# Altium PCB DVI_D_out.PcbDoc
Units mil, origin at the board's own origin, x right, y up, seen from the top; angles counter-clockwise.
Board outline 2370 x 2127 mil, 4 copper layers (Top Layer, Signal Layer 1, Signal Layer 2, Bottom Layer), stack 39.2 mil thick; 26 components, 47 nets, 207 pads, 228 vias.
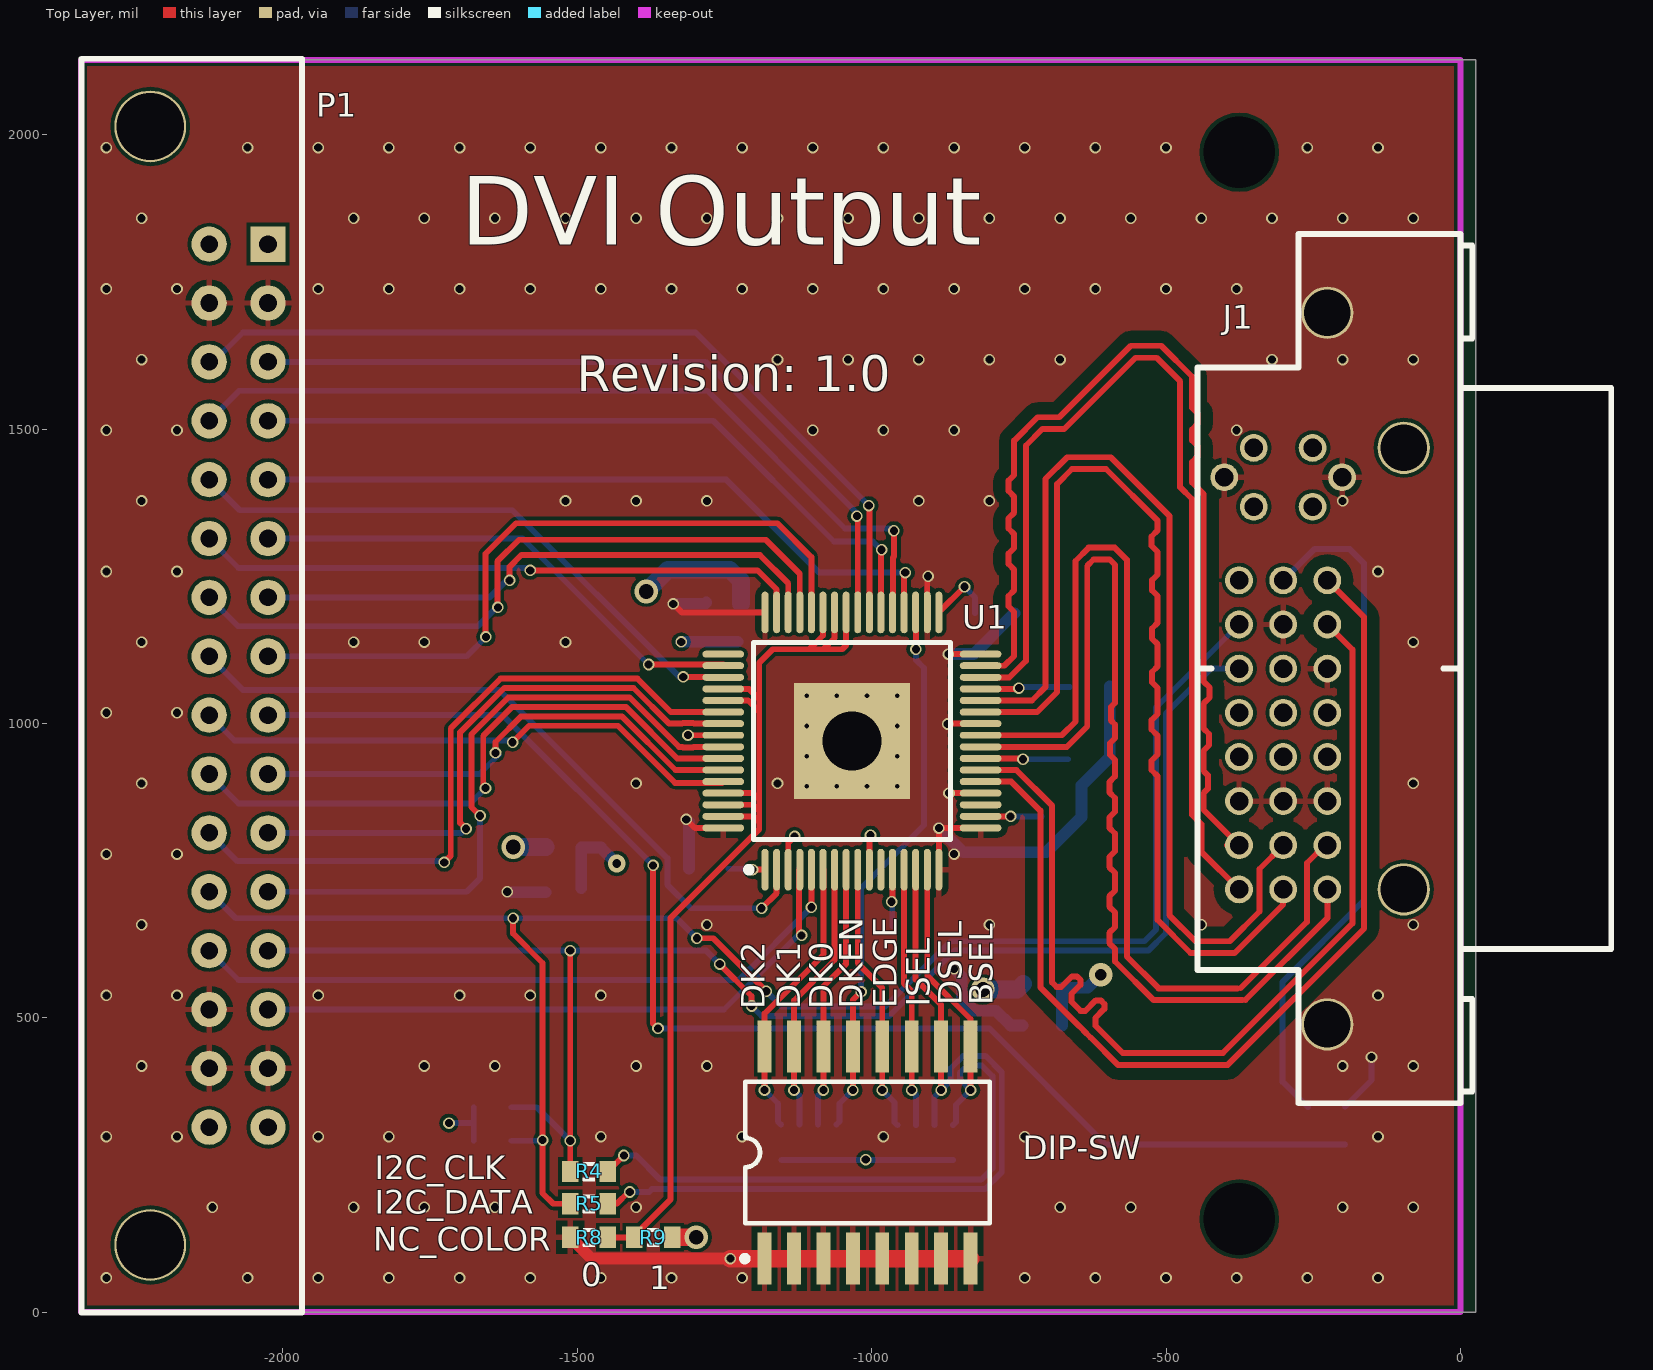
[diagram p0: Top Layer view]
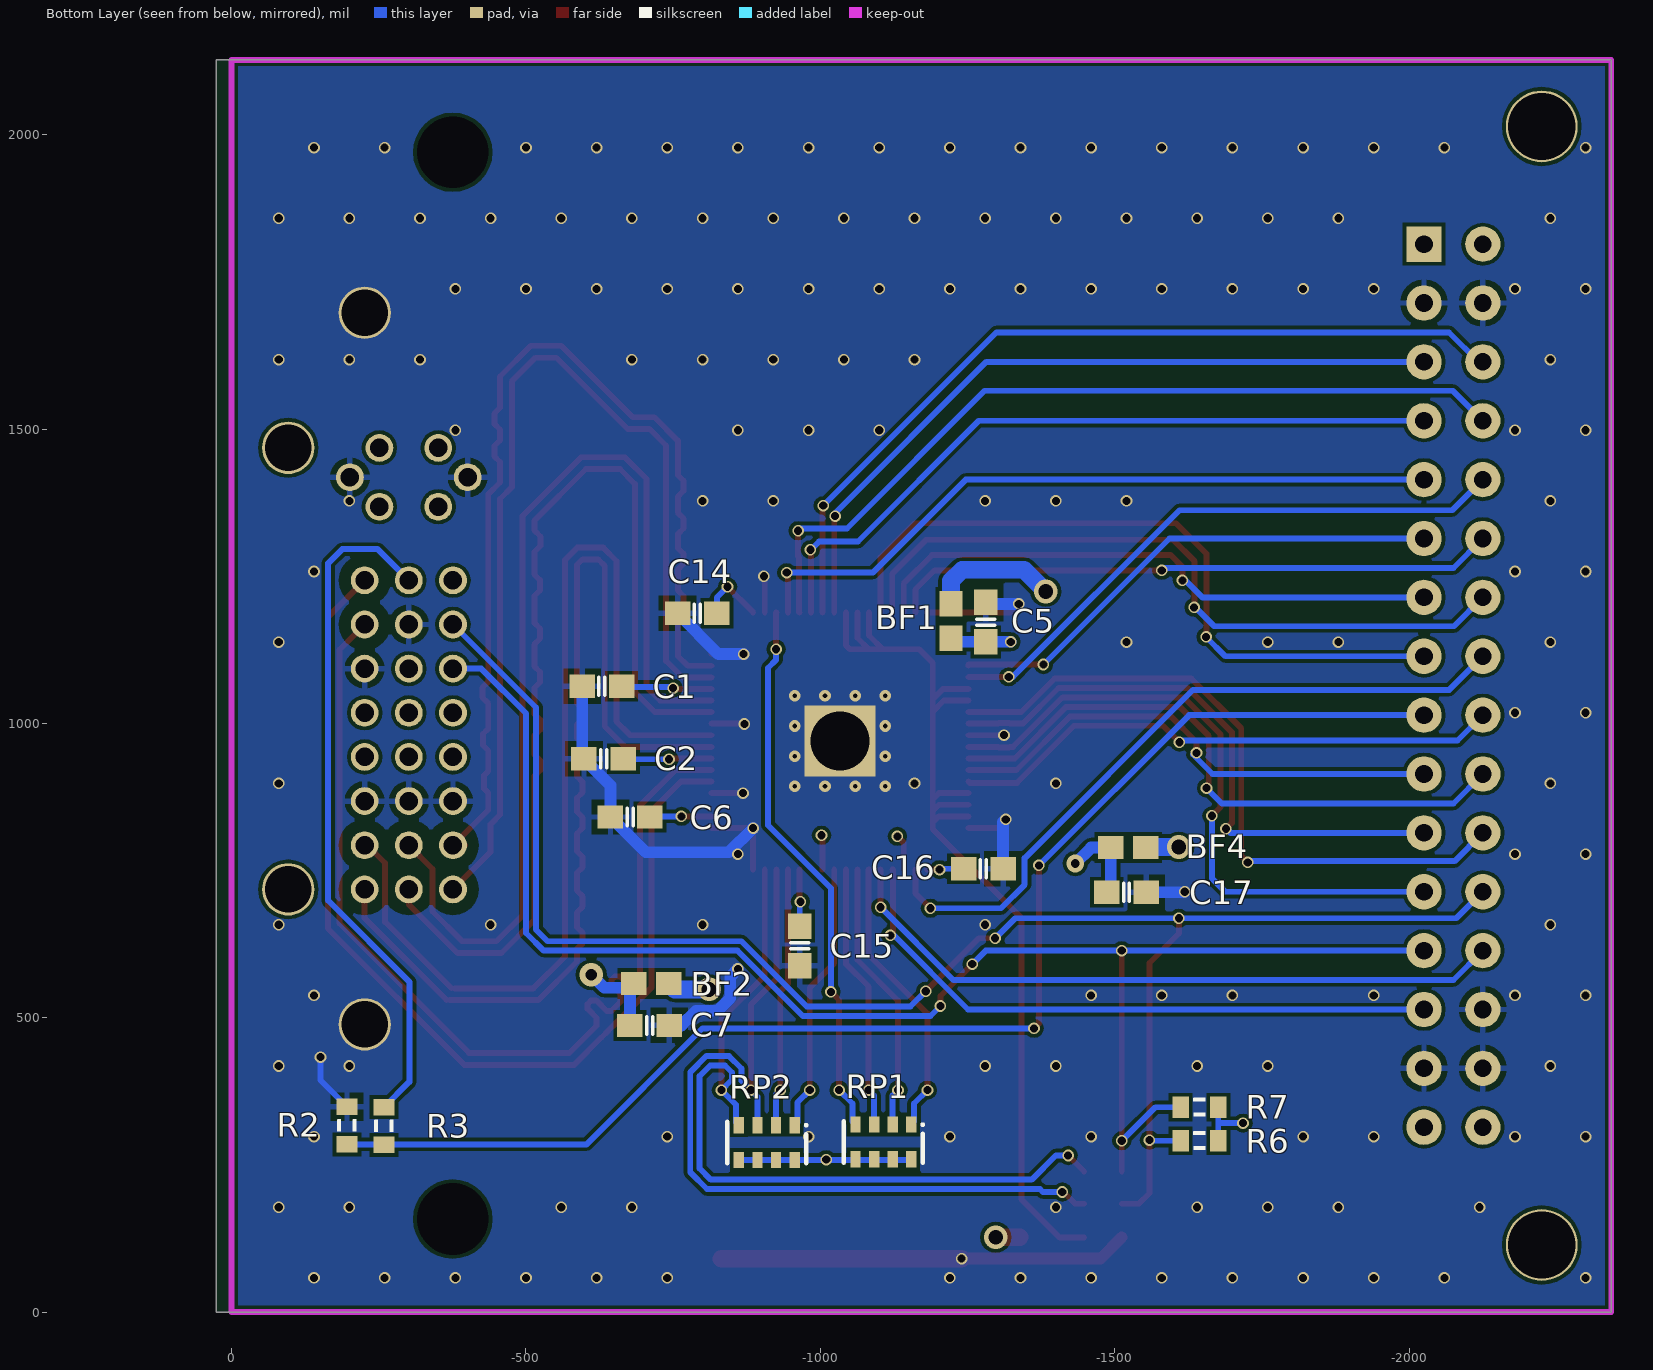
[diagram p1: Bottom Layer view, seen from below]
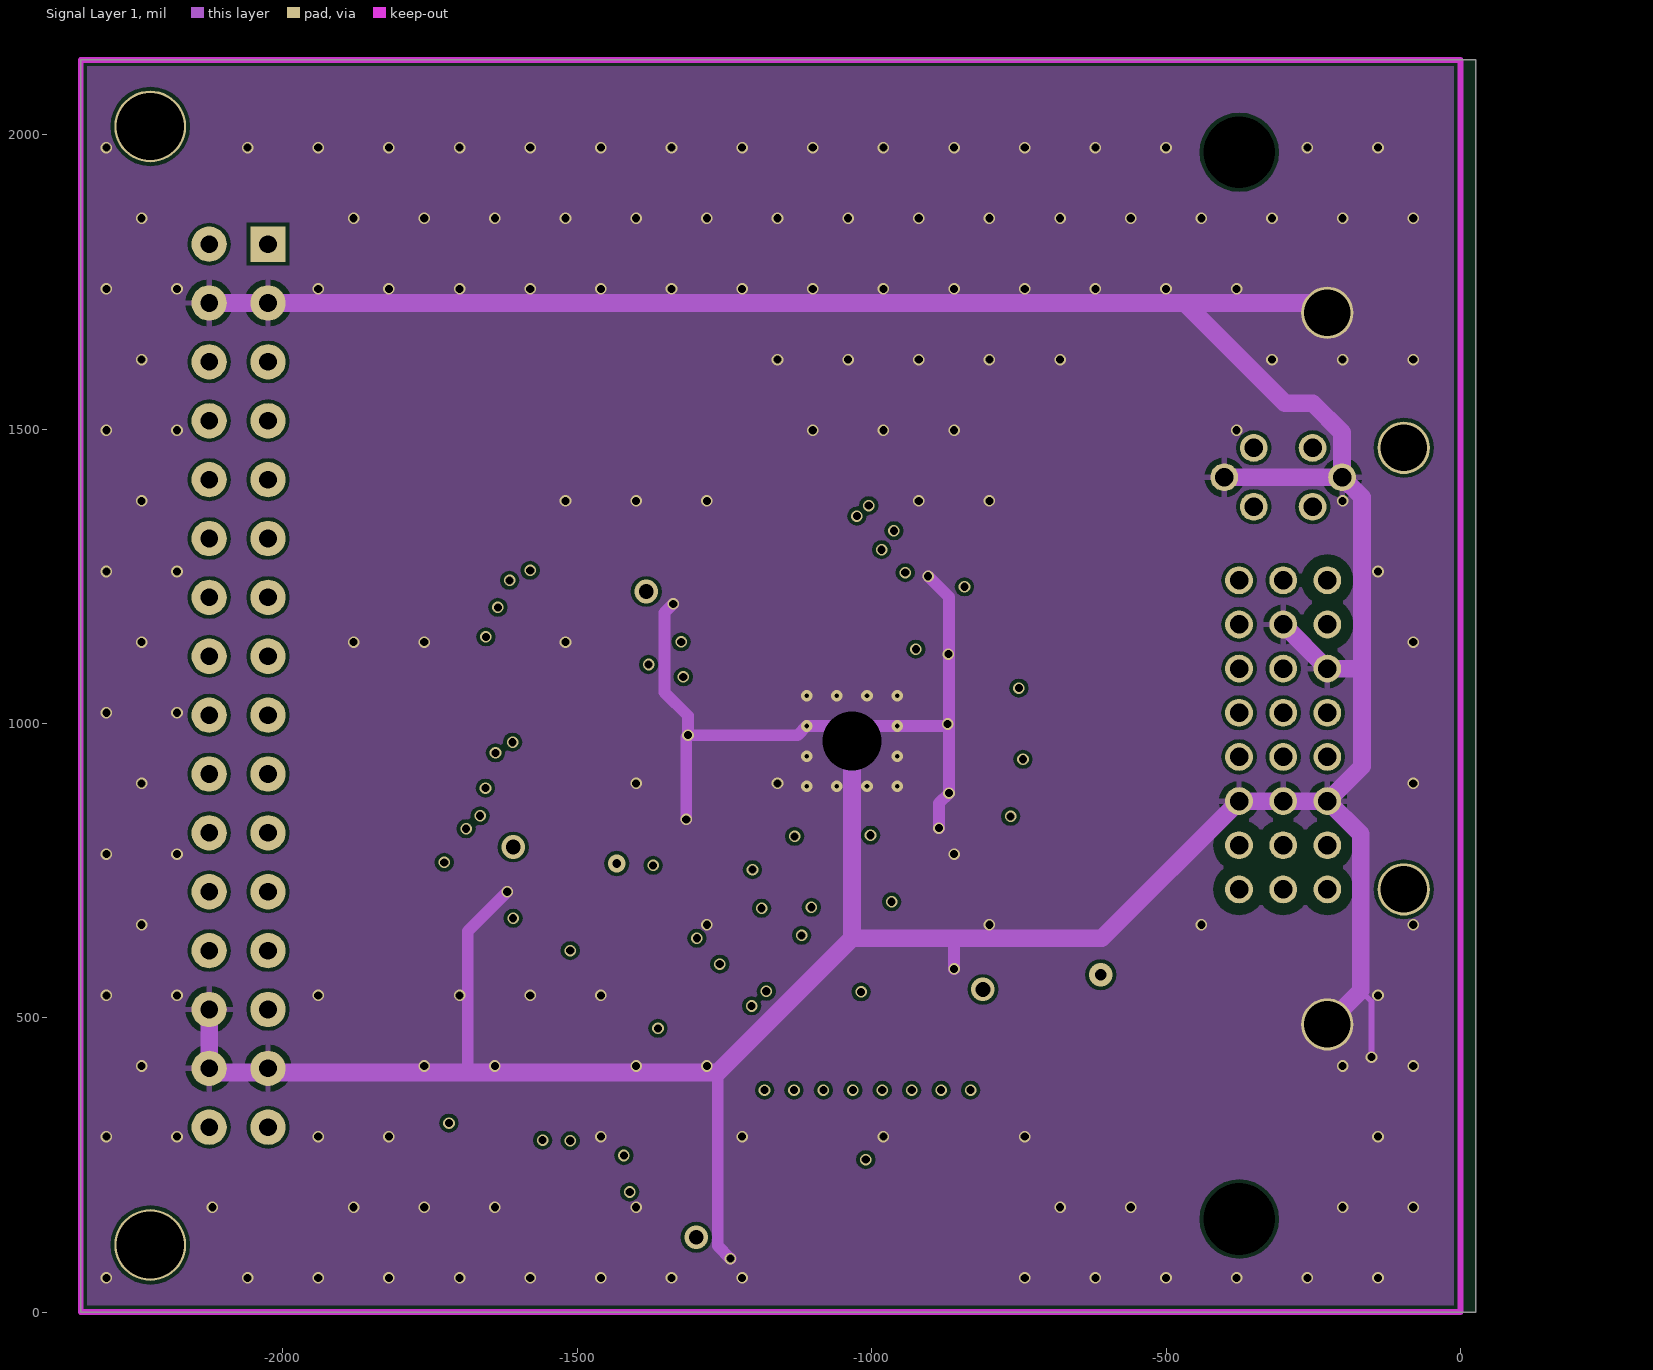
[diagram p2: Signal Layer 1]
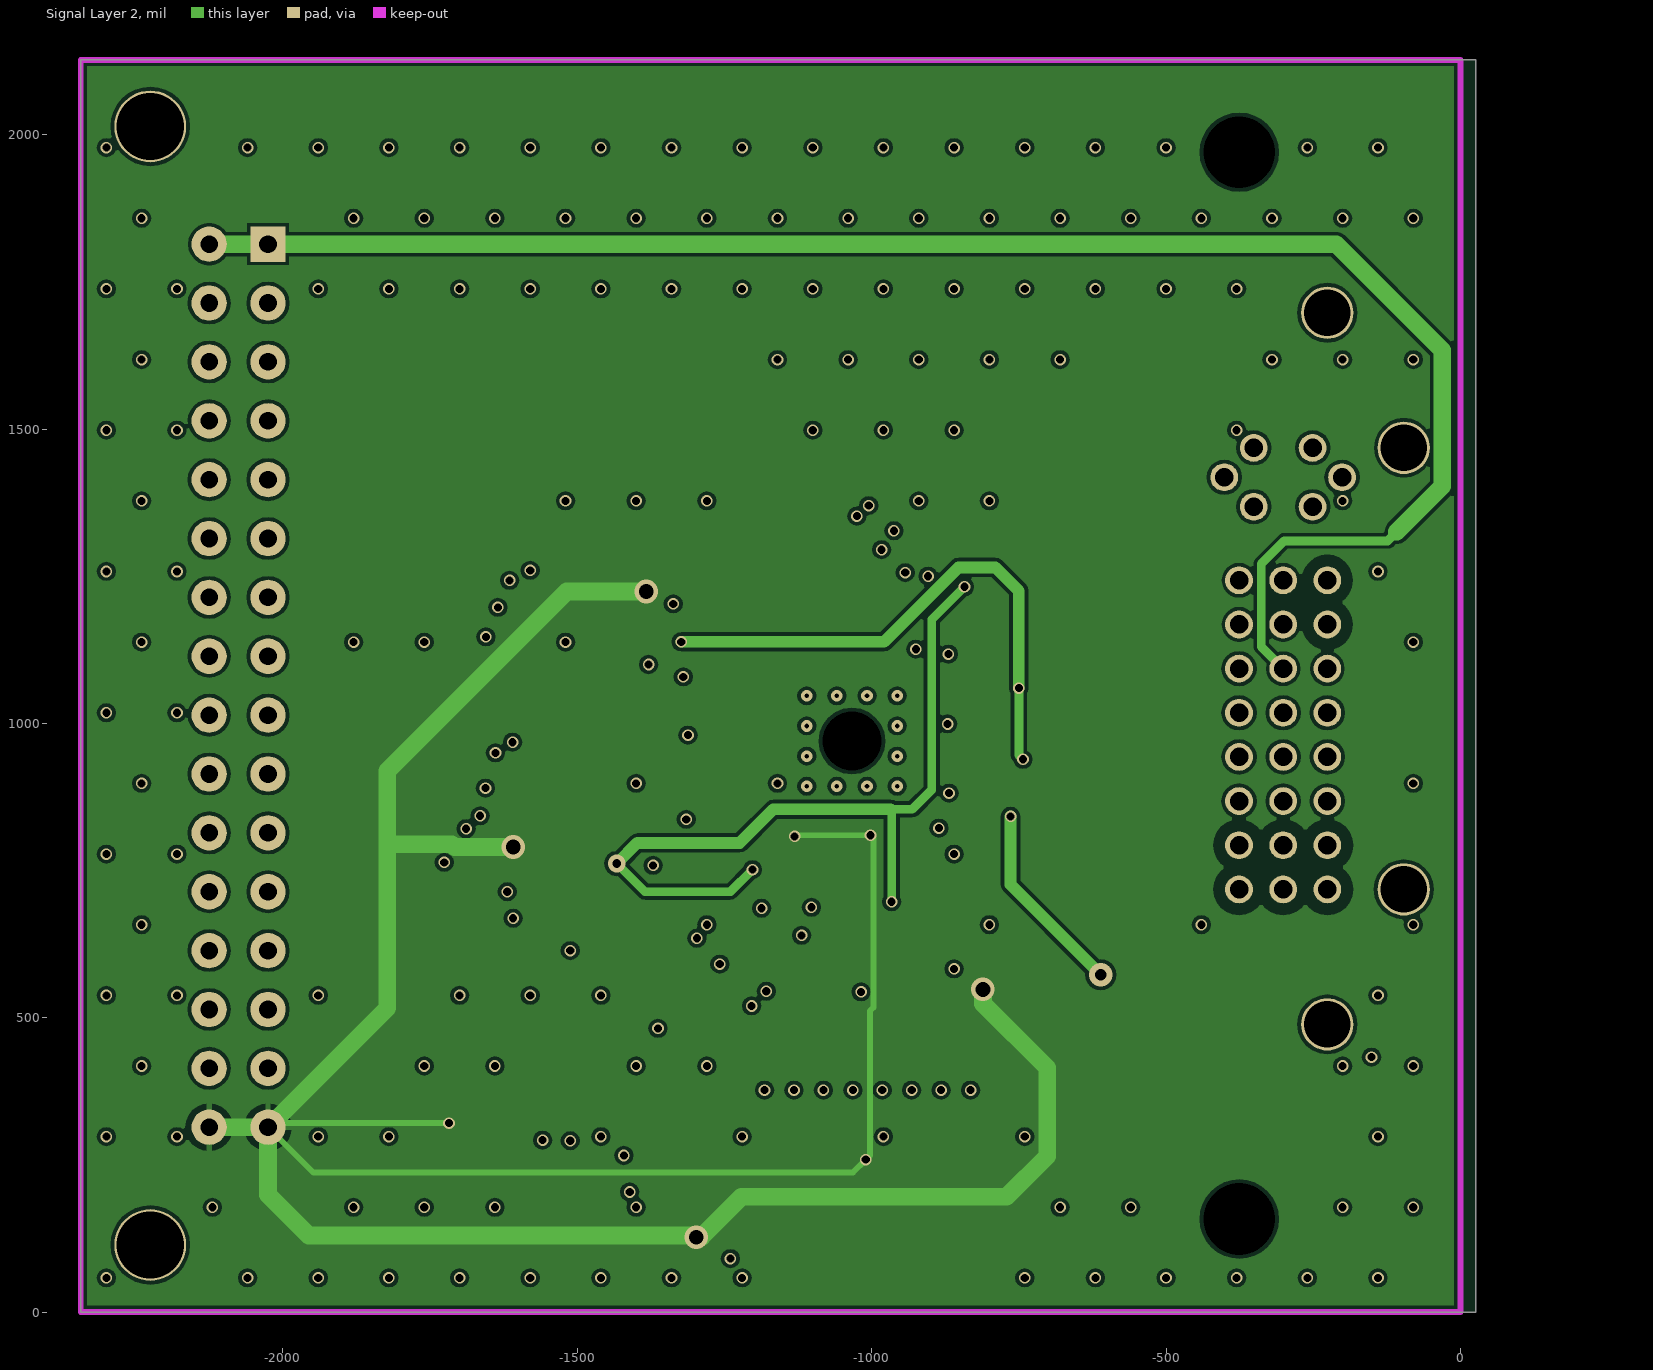
[diagram p3: Signal Layer 2]
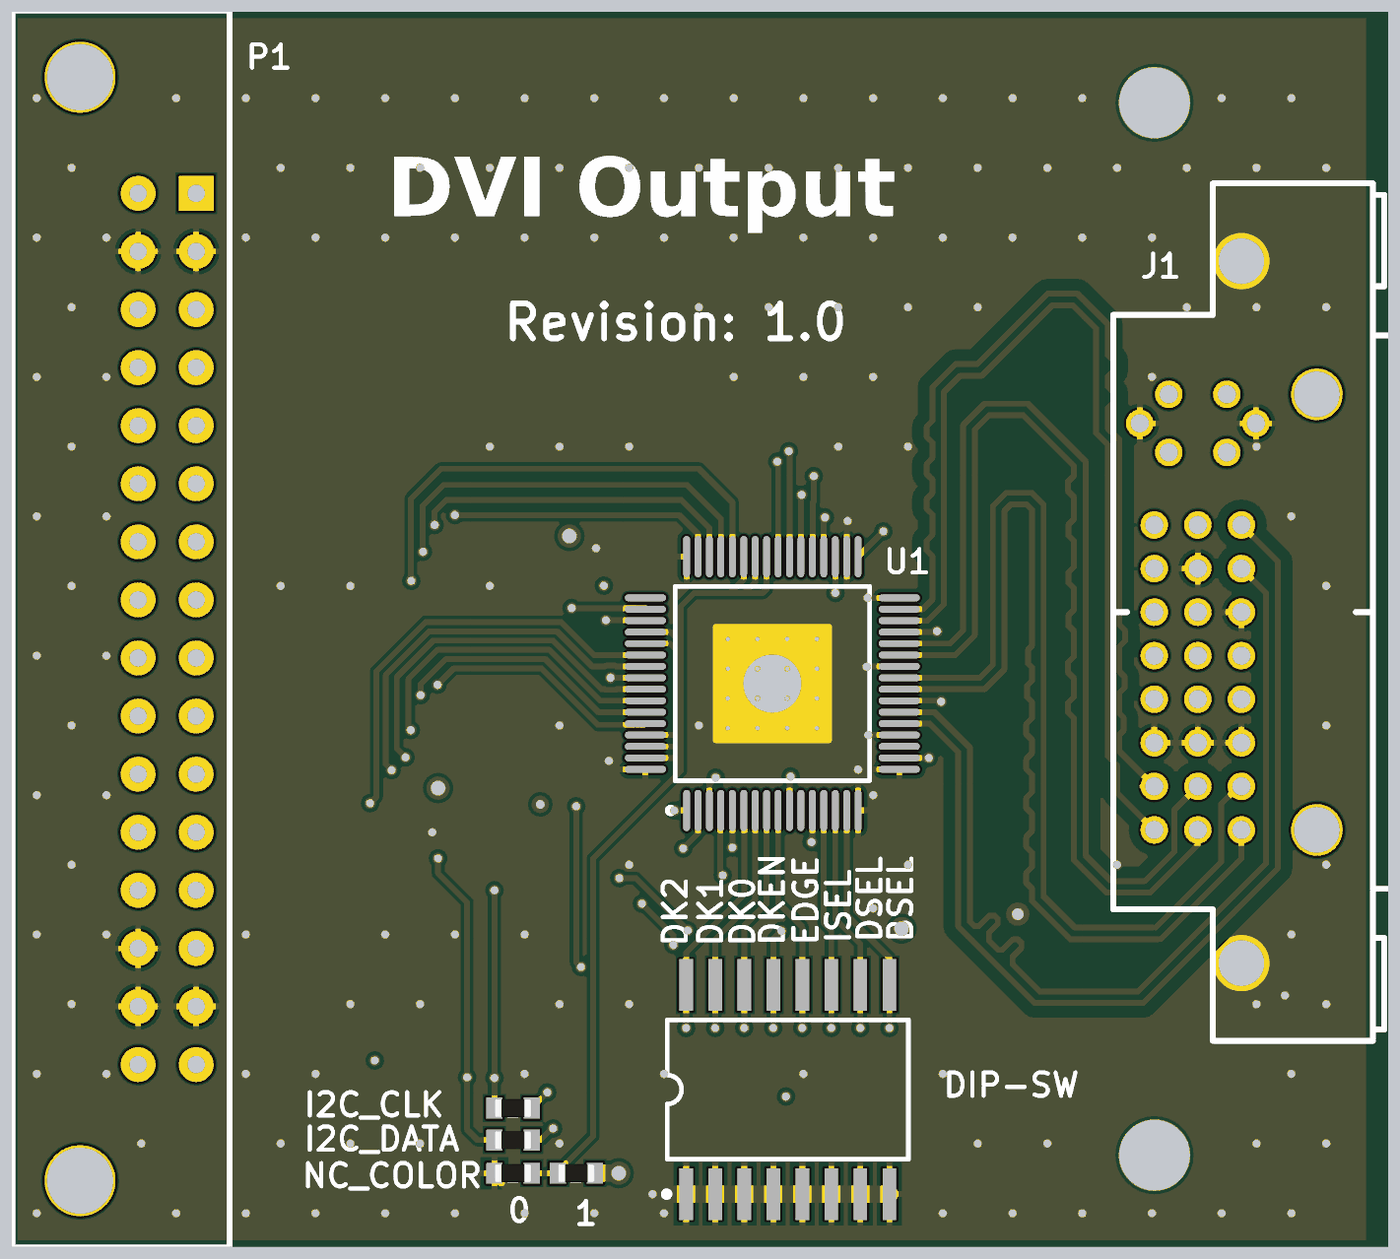
[diagram p4: 3D render of the assembled board from above, using the file's embedded part models]
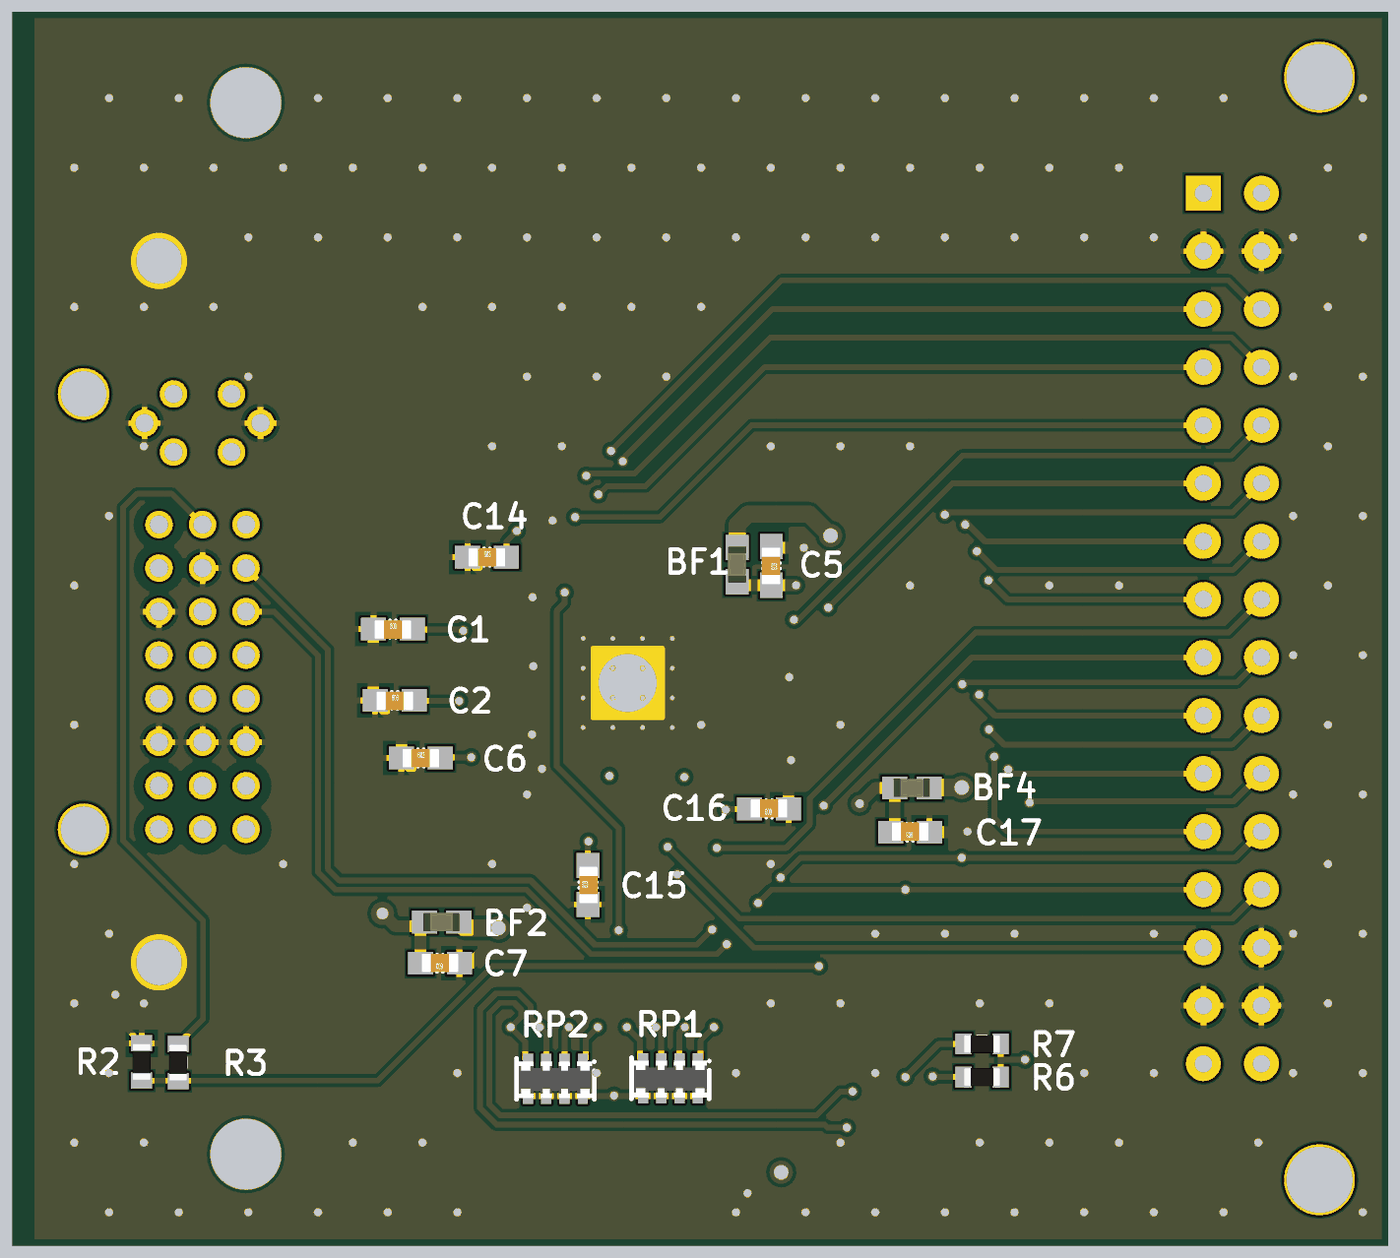
[diagram p5: 3D render of the assembled board from below, using the file's embedded part models]

## Layer stack, top to bottom
Top Solder: solder mask 0.4, Solder Resist, Dk 3.5
Top Layer: signal copper 1.4
Dielectric 1: core 15, FR-4, Dk 4.34
Signal Layer 1: signal copper 0.7
Dielectric 3: prepreg 5, Dk 4.2
Signal Layer 2: signal copper 0.7
Dielectric 2: core 15, FR-4, Dk 4.34
Bottom Layer: signal copper 1.4
Bottom Solder: solder mask 0.4, Solder Resist, Dk 3.5

## Board outline
-2343.5,0 -2343.5,2127 26.5,2127 26.5,0

## Design rules (kind name [scope] priority, off if disabled: settings)
Clearance "Poly and Diff" [InPoly vs InAnyDifferentialPair] p1: gap=20
Clearance "Stitching GND" [IsStitchingVia and InNet('GND') vs (IsVia and (Not IsStitchingVia)) Or IsPad] p2: gap=5
Clearance [All] p3: gap=6
DiffPairsRouting [All] p1: maxlimit=10 minlimit=10 mostfreqgap=10 toplayer_minwidth=6 toplayer_maxwidth=15 toplayer_prefwidth=15 midlayer1_minwidth=6 midlayer1_maxwidth=15 midlayer1_prefwidth=15 midlayer2_minwidth=6 midlayer2_maxwidth=15 midlayer2_prefwidth=15 bottomlayer_minwidth=6 bottomlayer_maxwidth=15 bottomlayer_prefwidth=15 maxuncoupledlength=500
MinimumSolderMaskSliver [All] p1: minsoldermaskwidth=3
PolygonConnect PolygonConnect_2 [All vs IsVia  Or (IsPad And HoleSize > 50)] p1: connectstyle=Direct reliefconductorwidth=10 reliefentries=4 polygonreliefangle="90 Angle" airgapwidth=10
PolygonConnect [All] p2: connectstyle=Relief reliefconductorwidth=10 reliefentries=4 polygonreliefangle="90 Angle" airgapwidth=10
RoutingVias [All] p1: holewidth=28 width=50 viastyle="Through Hole" minholewidth=11.81 minwidth=19.68 maxholewidth=39.37 maxwidth=50
SilkToSilkClearance [All] p1: silktosilkclearance=6
SilkToSolderMaskClearance [IsPad] p1: minsilkscreentomaskgap=3 clearancetoexposedcopper=TRUE
SolderMaskExpansion [All] p1: expansion=4
Width Width_Diff [InNetClass('Diff')] p1: maxlimit=10 minlimit=10 preferedwidth=10 impedancedriven=TRUE minimp=50.000000 maximp=50.000000 favimp=50.000000
Width [All] p2: maxlimit=40 minlimit=6 preferedwidth=10
26 further rules are at their usual default settings.

## Classes and differential pairs
differential pair D2: +D2_P -D2_N
differential pair D1: +D1_P -D1_N
differential pair D0: +D0_P -D0_N
differential pair CLK: +CLK_P -CLK_N

## Components (designator, comment, footprint, x,y, rotation, side; value= is the part's Value field where it differs from the comment)
BF1 "GZ1608D121TF" L-1608[0603] -1222,1174 r270 bottom
BF2 "GZ1608D121TF" L-1608[0603] -713,558 r0 bottom
BF4 "GZ1608D121TF" L-1608[0603] -1523,789 r0 bottom
C1 "Cap Semi" C-1608[0603] -629,1063 r180 bottom
C2 "Cap Semi" C-1608[0603] -632,940 r180 bottom
C5 "Cap Semi" C-1608[0603] -1281,1172 r270 bottom
C6 "Cap Semi" C-1608[0603] -677,841 r180 bottom
C7 "Cap Semi" C-1608[0603] -710,487 r0 bottom
C14 "Cap Semi" C-1608[0603] -791,1187 r180 bottom
C15 "Cap Semi" C-1608[0603] -965,622 r90 bottom
C16 "Cap Semi" C-1608[0603] -1277,753 r0 bottom
C17 "Cap Semi" C-1608[0603] -1520,713 r0 bottom
DIP-SW "DIP_SW" SO16W -1007,271 r0 top
J1 "DVI-I 24+5" DVI-I -226,1093 r270 top
P1 "CUPIIN 9001-38321C00A" "OUPIIN 9001-38321C00A" -2125.39,1814.01 r0 top
R2 "Res_0603" RES_0603 -196,317 r270 bottom
R3 "Res_0603" RES_0603 -259,316 r270 bottom
R4 "Res_0603" RES_0603 -1480,239 r180 top
R5 "Res_0603" RES_0603 -1480,184 r180 top
R6 "Res_0603" RES_0603 -1644,291 r180 bottom
R7 "Res_0603" RES_0603 -1644,348 r180 bottom
R8 "Res_0603" RES_0603 -1480,127 r180 top
R9 "Res_0603" RES_0603 -1371,127 r0 top
RP1 "10K" R0603x4 -1107,289 r0 bottom
RP2 "10K" R0603x4 -909,288 r0 bottom
U1 "TFP410PAP" PAP64-4650X4650TP_N -1033.5,970 r90 top

## Footprints (in the part's own frame and the unit in brackets; to place one, negate y for a bottom-side part, rotate by r counter-clockwise, add the part's x,y. Pads: shape width x height; smd on the part's side, far side on the other; paste and mask are expansions set on the pad)
C-1608[0603] [mm] "Chip Capacitor; Body 1.6 x 0.8 mm (LxW typ)"
  rect 1.1x1 smd: 1(-0.85,0) 2(0.85,0)
  silkscreen extent -0.13,-0.38 0.13,0.38, body extent -0.8,-0.42 0.8,0.38, height 0.29
DVI-I [mm]
  round 2.254 hole 2: 0(-15.35,0) 0(15.35,0) -1(-9.525,3.3) -1(9.525,3.3)
  round 1.2 hole 0.8: 1(9.525,-3.81) 2(7.62,-3.81) 3(5.715,-3.81) 4(3.81,-3.81) 5(1.905,-3.81) 6(0,-3.81) 7(-1.905,-3.81) 8(-3.81,-3.81) 9(9.525,-1.905) 10(7.62,-1.905) 11(5.715,-1.905) 12(3.81,-1.905) 13(1.905,-1.905) 14(0,-1.905) 15(-1.905,-1.905) 16(-3.81,-1.905) 17(9.525,0) 18(7.62,0) 19(5.715,0) 20(3.81,0) 21(1.905,0) 22(0,0) 23(-1.905,0) 24(-3.81,0) C1(-6.985,-3.175) C2(-9.525,-3.175) C3(-6.985,-0.635) C4(-9.525,-0.635) C5(-8.255,0.635) C5(-8.255,-4.445)
  silkscreen extent -18.75,-5.6 18.75,12.25
L-1608[0603] [mm] "Chip Inductor, Body 1.6x0.8mm, IPC Medium Density"
  rect 1.1x1 smd: 1(-0.75,0) 2(0.75,0)
  body extent -0.8,-0.41 0.8,0.39, height 0.45
"OUPIIN 9001-38321C00A" [mil]
  round 122.05 hole 114.17: 0(-100,-1700) 0(-100,200)
  rect 60x60 hole 30: 1(100,0)
  round 60 hole 30: 2(0,0) 3(100,-100) 4(0,-100) 5(100,-200) 6(0,-200) 7(100,-300) 8(0,-300) 9(100,-400) 10(0,-400) 11(100,-500) 12(0,-500) 13(100,-600) 14(0,-600) 15(100,-700) 16(0,-700) 17(100,-800) 18(0,-800) 19(100,-900) 20(0,-900) 21(100,-1000) 22(0,-1000) 23(100,-1100) 24(0,-1100) 25(100,-1200) 26(0,-1200) 27(100,-1300) 28(0,-1300) 29(100,-1400) 30(0,-1400) 31(100,-1500) 32(0,-1500)
  silkscreen extent -217,-1815 157,315
PAP64-4650X4650TP_N [mm] "Thin QFP, 64-Leads, Body 10x10mm, Pitch 0.5mm, Thermal Pad 5x5mm, IPC Medium Density"
  oval 1.8x0.3 smd: 1(-5.55,3.75) 2(-5.55,3.25) 3(-5.55,2.75) 4(-5.55,2.25) 5(-5.55,1.75) 6(-5.55,1.25) 7(-5.55,0.75) 8(-5.55,0.25) 9(-5.55,-0.25) 10(-5.55,-0.75) 11(-5.55,-1.25) 12(-5.55,-1.75) 13(-5.55,-2.25) 14(-5.55,-2.75) 15(-5.55,-3.25) 16(-5.55,-3.75) 33(5.55,-3.75) 34(5.55,-3.25) 35(5.55,-2.75) 36(5.55,-2.25) 37(5.55,-1.75) 38(5.55,-1.25) 39(5.55,-0.75) 40(5.55,-0.25) 41(5.55,0.25) 42(5.55,0.75) 43(5.55,1.25) 44(5.55,1.75) 45(5.55,2.25) 46(5.55,2.75) 47(5.55,3.25) 48(5.55,3.75)
  oval 0.3x1.8 smd: 17(-3.75,-5.55) 18(-3.25,-5.55) 19(-2.75,-5.55) 20(-2.25,-5.55) 21(-1.75,-5.55) 22(-1.25,-5.55) 23(-0.75,-5.55) 24(-0.25,-5.55) 25(0.25,-5.55) 26(0.75,-5.55) 27(1.25,-5.55) 28(1.75,-5.55) 29(2.25,-5.55) 30(2.75,-5.55) 31(3.25,-5.55) 32(3.75,-5.55) 49(3.75,5.55) 50(3.25,5.55) 51(2.75,5.55) 52(2.25,5.55) 53(1.75,5.55) 54(1.25,5.55) 55(0.75,5.55) 56(0.25,5.55) 57(-0.25,5.55) 58(-0.75,5.55) 59(-1.25,5.55) 60(-1.75,5.55) 61(-2.25,5.55) 62(-2.75,5.55) 63(-3.25,5.55) 64(-3.75,5.55)
  rect 5x5 / inner rect 0x0 / far side rect 3.048x3.048 hole 2.54: 65(0,0)
  silkscreen extent -5.67,-4.25 4.25,4.57, body extent -5,-5 5,5, height 1.2
R0603x4 [mm] "Chip Resistor Array, (0603x4); SM; 8 Leads; Body 3.40 x 1.80 mm (LxW max)"
  rect 0.45x0.7 smd: 1(-1.2,-0.75) 2(-0.4,-0.75) 3(0.4,-0.75) 4(1.2,-0.75) 5(1.2,0.75) 6(0.4,0.75) 7(-0.4,0.75) 8(-1.2,0.75)
  silkscreen extent -1.75,-0.9 1.7,0.9, body extent -1.6,-0.76 1.6,0.84, height 0.65
RES_0603 [mil]
  rect 28x36 smd: 1(-32,0) 2(32,0)
  silkscreen extent -10,-16 10,16, body extent -31,-16 32,16, height 20
SO16W [mm] "Small Outline; 16 Leads; Body Width 7.5 mm; Pitch 1.27 mm"
  rect 0.6x2.25 smd: 1(-4.445,-4.575) 2(-3.175,-4.575) 3(-1.905,-4.575) 4(-0.635,-4.575) 5(0.635,-4.575) 6(1.905,-4.575) 7(3.175,-4.575) 8(4.445,-4.575) 9(4.445,4.575) 10(3.175,4.575) 11(1.905,4.575) 12(0.635,4.575) 13(-0.635,4.575) 14(-1.905,4.575) 15(-3.175,4.575) 16(-4.445,4.575)
  silkscreen extent -5.42,-4.7 5.27,3.05

## Part data
BF1 BF2 BF4: library part Inductor
C1 C2 C5 C6 C7 C14 C15 C16 C17: "Capacitor (Semiconductor SIM Model)"
J1: library part DVI-I
P1: library part "Header 16X2", "Header, 16-Pin, Dual row"
R2 R3 R4 R5 R6 R7 R8 R9: "Resistor"
RP1 RP2: library part RPACK4
U1: library part CMP-0325-00079-1, "PanelBus DVI Transmitter 165 MHz with 3 Data Channels, 3.3 V, 0 to +70 degC, 64-pin HTQFP (PAP), Green (RoHS & no Sb/Br)"

## Free pads (board coordinates)
  round 0 hole 122.05: 0(-375.6,157.98) 0(-375.6,1970.02)

## Via types
v1: diameter 19.68, hole 13.78, Top Layer to Bottom Layer, 206 vias
v2: diameter 19.68, hole 7.87, Top Layer to Bottom Layer, 16 vias
v3: diameter 40, hole 25, Top Layer to Bottom Layer, 4 vias
v4: diameter 40, hole 20, Top Layer to Bottom Layer, 1 vias
v5: diameter 30, hole 15, Top Layer to Bottom Layer, 1 vias

## Nets (pads, with @x,y where several pads share a name; then routed paths per layer and width w, separated by ;. In a path a pad name is that pad's centre, name@x,y a point inside that pad or via, vN(x,y) a via of type N, cw(c..) or ccw(c..) an arc to the next point about the centre after c; other vN are vias at no path point)
+3.3V: BF1.1 BF2.1 BF4.1 P1.31 P1.32 R6.2 R7.2 R9.2 RP1.5 RP1.6 RP1.7 RP1.8 RP2.5 RP2.6 RP2.7 RP2.8 U1.3 U1.10 | length 6363.2
  Top Layer w10: U1.3 -1141.77,797.23 v1(-1131,808) ; U1.10 -1003.97,809.03 -1003,810 v1(-1002,810)
  Top Layer w30: R9.2 v3(-1298,127)
  Signal Layer 2 w10: P1.31 -1948.38,237 -1032,237 v1(-1010,259) ; P1.31@-2018.4,321 v1(-1718,321) ; v1(-1131,808) -1129,810 v1(-1002,810) -997.16,805.16 -997.16,517.32 -1002.84,511.63 -1002.84,266.16
  Signal Layer 2 w30: P1.32 P1.31 ; v3(-1609,790) -1708.38,790 -1713.22,794.84 -1815.16,794.84 -1823,787 ; v3(-1383,1224) -1518,1224 -1823,919 -1823,787 ; v3(-1298,127) v3@-1289,127 ; v3@-1298,130 -1956,130 -2025.39,199.39 P1.31 ; v3@-1289,130 -1287,130 -1221,196 -771,196 -702,265 -702,415 -811,524 v3(-811,548) ; P1.31 -2018.4,321 -1823,516.4 -1823,787
  Bottom Layer w10: v1(-1718,321) -1676,321 ; R6.2 -1676,321 ; R7.2 -1676,321 ; RP1.8@-1153.24,258.47 -1091.25,258.47 RP2.8 RP2.7 RP2.6 RP2.5
  Bottom Layer w30: v3(-1609,790) BF4.1@-1553.53,790 ; v3(-1383,1224) -1346,1261 -1241,1261 -1222,1242 BF1.1 ; v3(-811,548) -752.53,548 BF2.1
+5V: J1.14 P1.1 P1.2 | length 2955.7
  Signal Layer 2 w15: J1.14 -338.12,1130.12 -338.12,1270.88 -299,1310 -123.34,1310 -108,1325.34
  Signal Layer 2 w30: P1.2 P1.1 -211.01,1814.01 -30.71,1633.71 -30.71,1402.63 -108,1325.34
_UNUSED: R8.1 R9.1 U1.41 U1.42 U1.43 U1.52 U1.53 U1.61 U1.62 U1.63 | length 1799.4
  Top Layer w10: R8.1 -1406,127 -1342,191 -1342,669 -1191,820 -1191,832 ; U1.63 -1201.05,842.05 -1191,832 ; U1.62 -1201.73,861.73 -1191,851 ; U1.61 -1201.42,881.42 -1191,871 ; U1.53 -1209.9,1038.9 -1191,1020 ; U1.52 -1208.58,1058.58 -1191,1041 ; -1082.71,1126.71 -1082,1126 ; U1.43 -1082.71,1149.29 -1106,1126 ; U1.42 -1063.03,1144.97 -1082,1126 ; U1.41 -1043.34,1132.66 -1050,1126 -1082,1126 ; -1191,832 -1191,851 ; -1191,851 -1191,871 ; -1191,871 -1191,1020 ; -1191,1020 -1191,1041 ; -1191,1041 -1191,1103 -1168,1126 -1106,1126 ; -1106,1126 -1082,1126
B3: P1.18 U1.60 | length 945.1
  Top Layer w10: v1(-1610,968) -1582,996 -1431,996 -1334,899 -1254.11,899 U1.60
  Bottom Layer w10: P1.18 -2082.38,971 -1613,971 v1(-1610,968)
B4: P1.19 U1.59 | length 874.6
  Top Layer w10: v1(-1639,950) -1639,968.48 -1595.48,1012 -1424.37,1012 -1333.16,920.79 U1.59
  Bottom Layer w10: P1.19 -1665.99,914.01 -1633,947 -1636,950 v1(-1639,950)
B5: P1.20 U1.58 | length 1055.7
  Top Layer w10: v1(-1656,890) -1659.84,893.84 -1659.84,978.78 -1610.63,1028 -1417.75,1028 -1330.22,940.47 U1.58
  Bottom Layer w10: P1.20 -2075.38,864 -1682,864 v1(-1656,890)
B6: P1.21 U1.55 | length 1012
  Top Layer w10: v1(-1689,821) -1699,831 -1699,984.88 -1623.88,1060 -1404.49,1060 -1344.02,999.53 -1321.95,999.53 -1320.63,1000.84 -1303.37,1000.84 -1302.05,999.53 U1.55
  Bottom Layer w10: P1.21 -1696.99,814.01 -1689.5,821.5 v1(-1689,821)
B7: P1.22 U1.54 | length 1172.9
  Top Layer w10: v1(-1726,764) -1715,775 -1715,991.51 -1630.51,1076 -1397.86,1076 -1341.08,1019.21 U1.54
  Bottom Layer w10: P1.22 -2077.38,766 v1@-1726,766
BSEL: DIP-SW.9 R4.1 RP2.4 U1.15 | length 1427.7
  Top Layer w10: R4.1 v1(-1421,266) ; U1.15 -905.55,571.55 -832,498 DIP-SW.9 v1(-832,377)
  Bottom Layer w10: v1(-1421,266) -1400,266 -1359,225 -814,225 -795,244 -795,401 -813,419 -838,419 -850,407 -850,395 v1(-832,377) -856.76,352.24 -856.76,322.53 RP2.4
CLK_N: J1.24 U1.21 | length 1739.9
  Top Layer w10: U1.21 -762.89,901.1 -713.5,851.72 -713.5,551.72 -665.1,503.32 -665.1,503.12 -653.38,491.4 -653.18,491.4 -640,478.22 -640,478.02 -628.28,466.3 -628.08,466.3 -581.78,420 -395.21,420 -163.5,651.72 -163.5,1180.5 J1.24
CLK_P: J1.23 U1.22 | length 1739.8
  Top Layer w10: U1.22 -754.29,920.79 -693.5,860 -693.5,560 -685.8,552.3 -677.9,552.3 -659.85,570.35 -651.45,570.35 -645.4,564.3 -645.4,555.9 -660.7,540.6 -660.7,527.2 -644.9,511.4 ; -645.1,511.4 -644.9,511.4 ; J1.23 -183.5,1125.5 -183.5,660 -403.5,440 -573.5,440 -619.8,486.3 -620,499.7 -604.7,515 -604.7,523.4 -610.75,529.45 -619.15,529.45 -637.2,511.4 -644.9,511.4
D0_N: J1.17 U1.24 | length 1739.6
  Top Layer w10: U1.24 -669,960.16 ; -668.72,959.84 -633.9,994.66 -633.9,1267.62 -623.1,1278.42 -595.77,1278.42 -586.6,1269.25 -586.6,1034.84 -593.2,1028.24 -593.2,1004.64 -586.6,998.04 -586.6,974.84 -595.2,966.24 -595.2,946.64 -586.6,938.04 -586.6,909.94 -596.3,900.24 -596.3,882.84 -586.6,873.14 -586.6,849.84 -596.3,840.14 -596.3,822.74 -586.6,813.04 -586.6,782.84 -596.3,773.14 -596.3,755.74 -586.6,746.04 -586.6,715.84 -596.3,706.14 -596.3,688.74 -586.6,679.04 -586.6,653.84 -596.3,644.14 -596.3,626.74 -586.6,617.04 -586.6,595.66 -520.78,529.84 -370,529.84 ; -365.21,530 -226,669.22 J1.17
D0_P: J1.18 U1.25 | length 1739.5
  Top Layer w10: U1.25 -677,979.84 -653.9,1002.94 -653.9,1275.9 -631.38,1298.42 -587.02,1298.42 -566.6,1278 -566.6,603.94 -512.5,549.84 -379,549.84 ; -373.5,550 -260.62,662.88 -260.62,762.88 -230.5,793 J1.18
D1_N: J1.9 U1.27 | length 1739.3
  Top Layer w10: U1.27 -719.63,1019.21 ; -719.32,1018.9 -685,1053.21 -685,1406.72 -659.72,1432 -602.07,1432 ; -602,1432 -602.07,1432 ; -458.28,610 -514.28,666 -514.28,910.2 -524.79,920.7 -524.79,936.5 -514.28,947 -514.28,979.2 -524.79,989.7 -524.79,1005.5 -514.28,1016 -514.28,1060.2 -523.98,1069.9 -523.98,1087.3 -514.28,1097 -514.28,1134.2 -523.98,1143.9 -523.98,1161.3 -514.28,1171 -514.28,1216.2 -523.98,1225.9 -523.98,1243.3 -514.28,1253 -514.28,1291.2 -524.79,1301.7 -524.79,1317.5 -514.28,1328 -514.28,1344.21 -602.07,1432 ; -458,610 -383.5,610 -301,692.5 J1.9
D1_P: J1.10 U1.28 | length 1739.6
  Top Layer w10: U1.28 -727.6,1038.9 -705,1061.5 -705,1415 -668,1452 -594,1452 ; -593.79,1452 -494.28,1352.5 -494.28,674.28 -450,630 -391.78,630 -341.38,680.41 -341.38,752.62 J1.10
D2_N: J1.1 U1.30 | length 1739.8
  Top Layer w10: U1.30@-815,1077.95 -766.28,1077.95 -738,1106.23 -738,1472 -710,1500 -673,1500 -552,1621 -516,1621 -476,1581 -476,1401 -456,1381 -456,844.72 -440,828.72 -440,782 J1.1 ; U1.30 -774.56,1078.27 -774.4,1078.11
D2_P: J1.2 U1.31 | length 1739.5
  Top Layer w10: U1.31 -774.56,1097.95 -758,1114.52 -758,1189.2 -767.7,1198.9 -767.7,1216.3 -758,1226 -758,1261.2 -767.7,1270.9 -767.7,1288.3 -758,1298 -758,1321.2 -767.7,1330.9 -767.7,1348.3 -758,1358 -758,1385.2 -767.7,1394.9 -767.7,1412.3 -758,1422 -758,1480.28 -718.28,1520 -681.28,1520 -559.78,1641.5 -508.22,1641.5 -456,1589.28 -456,1536.08 -446.3,1526.38 -446.3,1508.98 -456,1499.28 -456,1480.8 -446.3,1471.1 -446.3,1453.7 -456,1444 -456,1409.28 -436,1389.28 -436,1070.8 -426.3,1061.1 -426.3,1043.7 -436,1034 -436,990.8 -427,981.8 -427,963 -436,954 -436,918.8 -429,911.8 -429,889 -436,882 -436,853 J1.2 J1.2@-396.5,793
DE: P1.16 U1.2 | length 1218.1
  Top Layer w10: v1(-1187,686) -1161.45,711.55 U1.2
  Bottom Layer w10: P1.16 -2068.38,1057 -1633,1057 -1347,771 -1347,726 -1307,686 v1(-1187,686)
DK1: DIP-SW.14 RP1.3 U1.8 | length 452.8
  Top Layer w10: v1(-1082,377) DIP-SW.14 -1082,553 -1043.34,591.66 U1.8
  Bottom Layer w10: RP1.3 -1091.25,367.75 v1(-1082,377)
DK2: DIP-SW.15 RP1.2 U1.7 | length 465.4
  Top Layer w10: v1(-1132,377) DIP-SW.15 -1132,529 -1063.03,597.97 U1.7
  Bottom Layer w10: v1(-1132,377) -1122.75,367.75 RP1.2
DK3: DIP-SW.16 RP1.1 U1.6 | length 487.2
  Top Layer w10: v1(-1182,377) DIP-SW.16 -1182,507 -1081.55,607.45 -1081.55,751.5 U1.6
  Bottom Layer w10: v1(-1182,377) -1159.24,354.24 -1159.24,323.53 RP1.1
DKEN: DIP-SW.13 RP1.4 U1.35 | length 937.5
  Top Layer w10: v1(-1032,377) DIP-SW.13 -1032,530 v1(-1018,544) ; U1.35 -925,1188.27 v1(-925,1126)
  Bottom Layer w10: RP1.4 -1054.76,323.53 -1054.76,354.24 v1(-1032,377) ; v1(-1018,544) -1018,720 -911,827 -911,1094 -925,1108 v1(-925,1126)
DSEL: DIP-SW.10 R5.1 RP2.3 U1.14 | length 1468.3
  Top Layer w10: R5.1 -1433,184 -1413,204 v1(-1411,204) ; U1.14 -925.23,565.23 -882,522 DIP-SW.10 v1(-882,377)
  Bottom Layer w10: v1(-1411,204) -1378,204 -1373,209 -807.37,209 -779,237.37 -779,407.63 -806.37,435 -844.63,435 -866,413.63 -866,393 v1(-882,377) -893.25,365.75 RP2.3
DVDD: BF4.2 C14.2 C15.2 C16.2 C17.2 U1.1 U1.12 U1.33 | length 1789.3
  Top Layer w10: v1(-1202.5,751.5) U1.1 ; v1(-966,697) -964.6,698.4 U1.12 ; U1.33 v1(-842.37,1232)
  Signal Layer 2 w15: v5(-1433,762) -1385,714 -1239.99,714 v1(-1202.5,751.5) ; v1(-966,697) -966,852 -964,854 -931,854 -898,887 -898,1176.37 v1(-842.37,1232)
  Signal Layer 2 w20: v5(-1433,762) -1398,797 -1224,797 -1167,854 -968,854
  Bottom Layer w10: C16.2 -1204,753 v1(-1202.5,751.5) ; v1(-966,697) -965,696 C15.2 ; v1(-842.37,1232) -824.46,1214.1 C14.2
  Bottom Layer w20: C17.2@-1493.47,719.94 BF4.2 -1460,789 v5(-1433,762)
EDGE: DIP-SW.12 RP2.1 U1.9 | length 461.9
  Top Layer w10: U1.9 -1023.66,592.66 -982,551 DIP-SW.12 v1(-982,377)
  Bottom Layer w10: v1(-982,377) -961.24,356.24 -961.24,322.53 RP2.1
G2: P1.10 U1.51 | length 1012.5
  Top Layer w10: v1(-1320,1079) -1252.74,1079 U1.51
  Bottom Layer w10: P1.10 -2073.38,1362 -1610,1362 -1327,1079 v1(-1320,1079)
G3: P1.11 U1.50 | length 864
  Top Layer w10: v1(-1379,1100) -1378.84,1099.84 -1252,1099.84 U1.50
  Bottom Layer w10: P1.11 -1593.01,1314.01 v1(-1379,1100)
G4: P1.12 U1.47 | length 1038.7
  Top Layer w10: v1(-1580,1260) -1194,1260 -1161.45,1227.45 U1.47
  Bottom Layer w10: P1.12 -2075.38,1264 -1584,1264 v1(-1580,1260)
G5: P1.13 U1.46 | length 996.2
  Top Layer w10: v1(-1615,1243) -1615,1266 -1595,1286 -1190,1286 -1141.77,1237.77 U1.46
  Bottom Layer w10: P1.13 -1648.99,1214.01 -1620,1243 v1(-1615,1243)
G6: P1.14 U1.45 | length 1221
  Top Layer w10: v1(-1635,1197) -1635.84,1197.84 -1635.84,1275.16 -1599,1312 -1180,1312 -1122.08,1254.08 U1.45
  Bottom Layer w10: P1.14 -2076.38,1165 -1669,1165 -1637,1197 v1(-1635,1197)
G7: P1.15 U1.44 | length 1218.1
  Top Layer w10: v1(-1655.19,1146.81) -1655.84,1147.47 -1655.84,1288.16 -1604,1340 -1160,1340 -1102.4,1282.4 U1.44
  Bottom Layer w10: P1.15 -1687.99,1114.01 v1(-1655.19,1146.81)
GND: C1.1 C2.1 C5.1 C6.1 C7.1 C14.1 C15.1 C16.1 C17.1 DIP-SW.1 DIP-SW.2 DIP-SW.3 DIP-SW.4 DIP-SW.5 DIP-SW.6 DIP-SW.7 DIP-SW.8 J1.0 J1.3 J1.11 J1.15 J1.19 J1.22 J1.C5 P1.3 P1.4 P1.28 P1.29 P1.30 R2.1 R8.2 U1.16 U1.17 U1.20 U1.26 U1.32 U1.34 U1.48 U1.56 U1.64 U1.65 | length 10861.7
  Top Layer w10: v1(-1337,1203) -1322.5,1188.5 U1.48 ; v1(-1315,837) -1300.36,822.36 U1.64 ; v1@-1311.84,979.84 U1.56 ; U1.34 -905.55,1248.45 v1(-904,1250) ; U1.16 v1(-885.86,822.14) -885.64,822.36 U1.17 ; v1(-871,999) -870.47,999.53 U1.26 ; v1(-869.64,1117.64) U1.32 ; v1(-868.58,881.42) U1.20
  Top Layer w20: R8.2 -1475.88,90.88 v1(-1239.88,90.88)
  Top Layer w30: v1(-1239.88,90.88) DIP-SW.1 DIP-SW.2 DIP-SW.3 DIP-SW.4 DIP-SW.5 DIP-SW.6 DIP-SW.7 DIP-SW.8
  Signal Layer 1 w10: -169,545.67 -151,527.67 v1(-151,433)
  Signal Layer 1 w20: -1686,407 -1686,647 v1(-1619,714) ; v1(-1337,1203) -1352,1188 -1352,1053 -1312,1013 v1(-1312,980) -1125.86,980 v2(-1110.27,995.59) v2(-1059.09,995.59) v2(-1007.91,995.59) v2(-956.73,995.59) v1@-874.41,995.59 ; v1(-1315,837) v1@-1315,977 ; -1261.54,407 -1261.54,112.54 v1(-1239.88,90.88) ; v1(-904,1250) -868.58,1214.58 v1(-868.58,881.42) -885.86,864.14 v1(-885.86,822.14) ; v1(-860,583) -860,634.04
  Signal Layer 1 w30: P1.28 P1.30 -2118.38,407 -1686,407 -1261.54,407 -1033.5,635.04 ; P1.4 P1.3 -1820,1714.01 -1460,1714.01 -468,1714.01 ; U1.65 -1033.5,635.04 ; J1.C5@-401,1418 J1.C5@-201,1418 ; J1.15 J1.22 -169,1093 ; J1.0@-226,488.67 -169,545.67 -169,812 -225,868 J1.19 ; J1.0@-226,1697.33 -242.68,1714.01 -468,1714.01 ; -1033.5,635.04 -608.96,635.04 J1.3 J1.11 J1.19 ; -468,1714.01 -297.99,1544 -251,1544 -201,1494 J1.C5@-201,1418 ; J1.19 -167,927 -167,1384 J1.C5@-201,1418
  Bottom Layer w10: R2.1 -151,394 v1(-151,433)
  Bottom Layer w20: v1(-1619,714) -1618,713 C17.1 ; v1(-1337,1203) -1283.46,1203 C5.1 ; C16.1 v1@-1310.46,832.46 ; v1(-885.86,822.14) -844.72,781 -703.54,781 C6.1 -643.54,895 C2.1 -595.54,943 C1.1 ; v1(-869.64,1117.64) -826.9,1117.64 C14.1 ; v1(-860,583) -847,570 -847,533.09 -825.91,512 -789,512 -764,487 C7.1
  other v1: -2300,58 -2060,58 -1940,58 -1820,58 -1700,58 -1580,58 -1460,58 -1340,58 -1220,58 -740,58 -620,58 -500,58 -380,58 -260,58 -140,58 -2120,178 -1880,178 -1760,178 -1640,178 -1400,178 -680,178 -560,178 -200,178 -80,178 -2300,298 -2180,298 -1940,298 -1820,298 -1460,298 -1220,298 -980,298 -740,298 -140,298 -2240,418 -1760,418 -1640,418 -1400,418 -1280,418 -200,418 -80,418 -2300,538 -2180,538 -1940,538 -1700,538 -1580,538 -1460,538 -140,538 -2240,658 -1280,658 -800,658 -440,658 -80,658 -2300,778 -2180,778 -860,778 -2240,898 -1400,898 -1160,898 -80,898 -2300,1018 -2180,1018 -2240,1138 -1880,1138 -1760,1138 -1520,1138 -80,1138 -2300,1258 -2180,1258 -140,1258 -2240,1378 -1520,1378 -1400,1378 -1280,1378 -920,1378 -800,1378 -200,1378 -2300,1498 -2180,1498 -1100,1498 -980,1498 -860,1498 -380,1498 -2240,1618 -1160,1618 -1040,1618 -920,1618 -800,1618 -680,1618 -320,1618 -200,1618 -80,1618 -2300,1738 -2180,1738 -1940,1738 -1820,1738 -1700,1738 -1580,1738 -1460,1738 -1340,1738 -1220,1738 -1100,1738 -980,1738 -860,1738 -740,1738 -620,1738 -500,1738 -380,1738 -2240,1858 -1880,1858 -1760,1858 -1640,1858 -1520,1858 -1400,1858 -1280,1858 -1160,1858 -1040,1858 -920,1858 -800,1858 -680,1858 -560,1858 -440,1858 -320,1858 -200,1858 -80,1858 -2300,1978 -2060,1978 -1940,1978 -1820,1978 -1700,1978 -1580,1978 -1460,1978 -1340,1978 -1220,1978 -1100,1978 -980,1978 -860,1978 -740,1978 -620,1978 -500,1978 -260,1978 -140,1978
  other v2: -1110.27,893.23 -1059.09,893.23 -1007.91,893.23 -956.73,893.23 -1110.27,944.41 -1059.09,944.41 -1007.91,944.41 -956.73,944.41 -1110.27,1046.77 -1059.09,1046.77 -1007.91,1046.77 -956.73,1046.77
HPD: P1.17 R2.2 R3.2 | length 2288.6
  Top Layer w10: v1(-1371.26,758.74) -1371.26,490.26 v1(-1363,482)
  Bottom Layer w10: P1.17 -1626.53,1014.01 v1(-1371.26,758.74) ; v1(-1363,482) -800,482 -603,285 R2.2
HSYNC: P1.27 U1.4 | length 1073
  Top Layer w10: U1.4 -1123.24,751.5 -1123.24,644.24 v1(-1119,640)
  Bottom Layer w10: P1.27 -1250.99,514.01 -1125,640 v1(-1119,640)
I2C_CLK: J1.6 P1.25 R4.2 R7.1 | length 2666.8
  Top Layer w10: R4.2 v1(-1512,291) v1(-1512,614.01) ; v1(-1258,591) -1204,537 v1(-1204,520)
  Bottom Layer w10: P1.25 v1(-1512,614.01) -1281.01,614.01 v1(-1258,591) ; R7.1 -1569,348 v1(-1512,291) ; v1(-1204,520) -1187,503 -970.37,503 -859.37,614 -530,614 -500,644 -500,1017 -424,1093 J1.6
I2C_DATA: J1.7 P1.24 R5.2 R6.1 | length 2915.6
  Top Layer w10: v1(-1609,669) -1609,643 -1559,593 v1(-1559,292) -1559,202 -1541,184 R5.2 ; v1(-1297,635) -1269,635 v1(-1179,545)
  Bottom Layer w10: P1.24 -2080.38,669 v1(-1609,669) -1331,669 v1(-1297,635) ; R6.1 -1560,291 v1(-1559,292) ; v1(-1179,545) -1153,519 -977,519 -866,630 -536.63,630 -517,649.63 -517,1027 J1.7
IDCK: P1.23 U1.57 | length 1109.9
  Top Layer w10: v1(-1665,843) -1680,858 -1680,981.25 -1617.25,1044 -1411.12,1044 -1327.28,960.16 -1321.63,960.16 -1320.63,959.16 -1303.37,959.16 -1302.37,960.16 U1.57
  Bottom Layer w10: P1.23 -1687.99,714.01 -1665,737 v1(-1665,843)
ISEL: DIP-SW.11 RP2.2 U1.13 | length 442.3
  Top Layer w10: U1.13 -944.92,557.92 -932,545 DIP-SW.11 v1(-932,377)
  Bottom Layer w10: v1(-932,377) -924.75,369.75 RP2.2
NetJ1_16: J1.16 R3.1 | length 1167.9
  Bottom Layer w10: J1.16 -248,1296 -188,1296 -164,1272 -164,699 -302,561 -302,391 R3.1
PVDD: BF2.2 C6.2 C7.2 U1.18 | length 574.6
  Top Layer w10: U1.18 v1(-764.05,842.05)
  Signal Layer 2 w20: v1(-764.05,842.05) -764.05,726.05 v4(-611,573)
  Bottom Layer w10: v1(-764.05,842.05) C6.2@-711.51,842.05
  Bottom Layer w20: C7.2 -676.54,551.06 -632.94,551.06 v4(-611,573)
R3: P1.5 U1.40 | length 1275.9
  Top Layer w10: v1(-1025,1352) -1023.66,1350.66 U1.40
  Bottom Layer w10: P1.5 -1282.01,1614.01 -1025,1357 v1(-1025,1352)
R4: P1.6 U1.39 | length 1444.8
  Top Layer w10: v1(-1005,1370) -1003.97,1368.97 U1.39
  Bottom Layer w10: P1.6 -2117.99,1614.01 -2068,1664 -1299,1664 v1(-1005,1370)
R5: P1.7 U1.38 | length 1240.7
  Top Layer w10: U1.38 -984.29,1294.71 -984,1295 v1(-983,1295)
  Bottom Layer w10: P1.7 -1269.01,1514.01 -1064,1309 -998,1309 -984,1295 v1(-983,1295)
R6: P1.8 U1.37 | length 1422.5
  Top Layer w10: U1.37 -964,1189.11 -964,1281.68 -962.16,1283.52 v1(-962.16,1327.16)
  Bottom Layer w10: P1.8 -2074.4,1565 -1279,1565 -1045.16,1331.16 -966.16,1331.16 v1(-962.16,1327.16)
R7: P1.9 U1.36 | length 1216.1
  Top Layer w10: U1.36@-945,1188.59 -945,1254 v1(-943,1256)
  Bottom Layer w10: P1.9 -1247.01,1414.01 -1089,1256 v1(-943,1256)
TVDD: BF1.2 C1.2 C2.2 C5.2 U1.23 U1.29 | length 1330.1
  Top Layer w10: U1.23 -744.47,940.47 v1(-743,939) ; U1.29 -751.42,1058.58 v1(-750,1060)
  Signal Layer 2 w10: v1@-743,938 v1(-743,939)
  Signal Layer 2 w15: v1(-750,1060) -750,946 v1(-743,939)
  Signal Layer 2 w20: v1(-1323.54,1138.54) -978.92,1138.54 -852.45,1265 -790,1265 -750,1225 v1(-750,1060)
  Bottom Layer w10: v1(-750,1060) -748,1062 C1.2@-663.46,1062 ; v1(-743,939) C2.2@-666.46,939
  Bottom Layer w20: v1(-1323.54,1138.54) C5.2 BF1.2@-1227.94,1138.54
VSYNC: P1.26 U1.5 | length 1158.8
  Top Layer w10: v1(-1102.4,687.6) U1.5
  Bottom Layer w10: P1.26 -2075.38,564 -1226,564 v1(-1102.4,687.6)
pads on no net: J1.4 J1.5 J1.8 J1.12 J1.13 J1.20 J1.21 J1.-1 J1.C1 J1.C2 J1.C3 J1.C4 P1.0 U1.11 U1.19 U1.49

## Polygon pours and split planes (outlines as drawn)
GND on Top Layer "Top Layer-No Net 1" (solid, remove dead copper, pour order 2): -2421,2205 -2399,2183 301,2183 301,-252 276,-277 194,-195 -2593,-195
GND on Signal Layer 1 "Top Layer-No Net 1" (solid, remove dead copper, pour order 4): -2541,2299 189,2299 227,2261 156,2190 156,-318 -2569,-318 -2626,-261
GND on Bottom Layer "Top Layer-No Net 1" (solid, remove dead copper, pour order 8): -2488,2324 178,2324 260,2242 167,2149 167,-166 -2523,-166 -2531,-158
+3.3V on Signal Layer 2 "Top Layer-No Net 1" (solid, remove dead copper, pour order 10): 102,2159 82,2179 -2402,2179 -2402,-109 -2434,-141 -2372,-203 289,-203

## Keep-outs
Keep-Out Layer:
  lines w10: -2343.5,0 0,0 0,2127 -2343.5,2127 -2343.5,0

## Silkscreen, mask and mechanical layers (free items; w line width, h text height)
Top Overlay:
  text "DVI Output" at -1698,1775 h200
  text "Revision: 1.0" at -1501,1564 h60
  text "DSEL" at -847,521 h40 r90
  text "BSEL" at -794,521 h40 r90
  text "ISEL" at -901,519 h40 r90
  text "EDGE" at -957,516 h40 r90
  text "DKEN" at -1015,515 h40 r90
  text "DK2" at -1182,514 h40 r90
  text "DK1" at -1121,514 h40 r90
  text "DK0" at -1066,514 h40 r90
  text "I2C_CLK" at -1844,226 h40
  text "I2C_DATA" at -1844,167 h40
  text "NC_COLOR" at -1847,104 h40
  text "0" at -1493,44 h40
  text "1" at -1378,39 h40